# Altium PCB steve.PcbDoc (part 2 of 3)
Units mm, origin at the board's own origin, x right, y up, seen from the top; angles counter-clockwise.
Board outline 168.82 x 167.1 mm, 4 copper layers (Top Layer, Mid-Layer 1, Mid-Layer 2, Bottom Layer); 272 components, 254 nets, 1057 pads, 241 vias.
Unrouted connection lines stored in the file: 229.
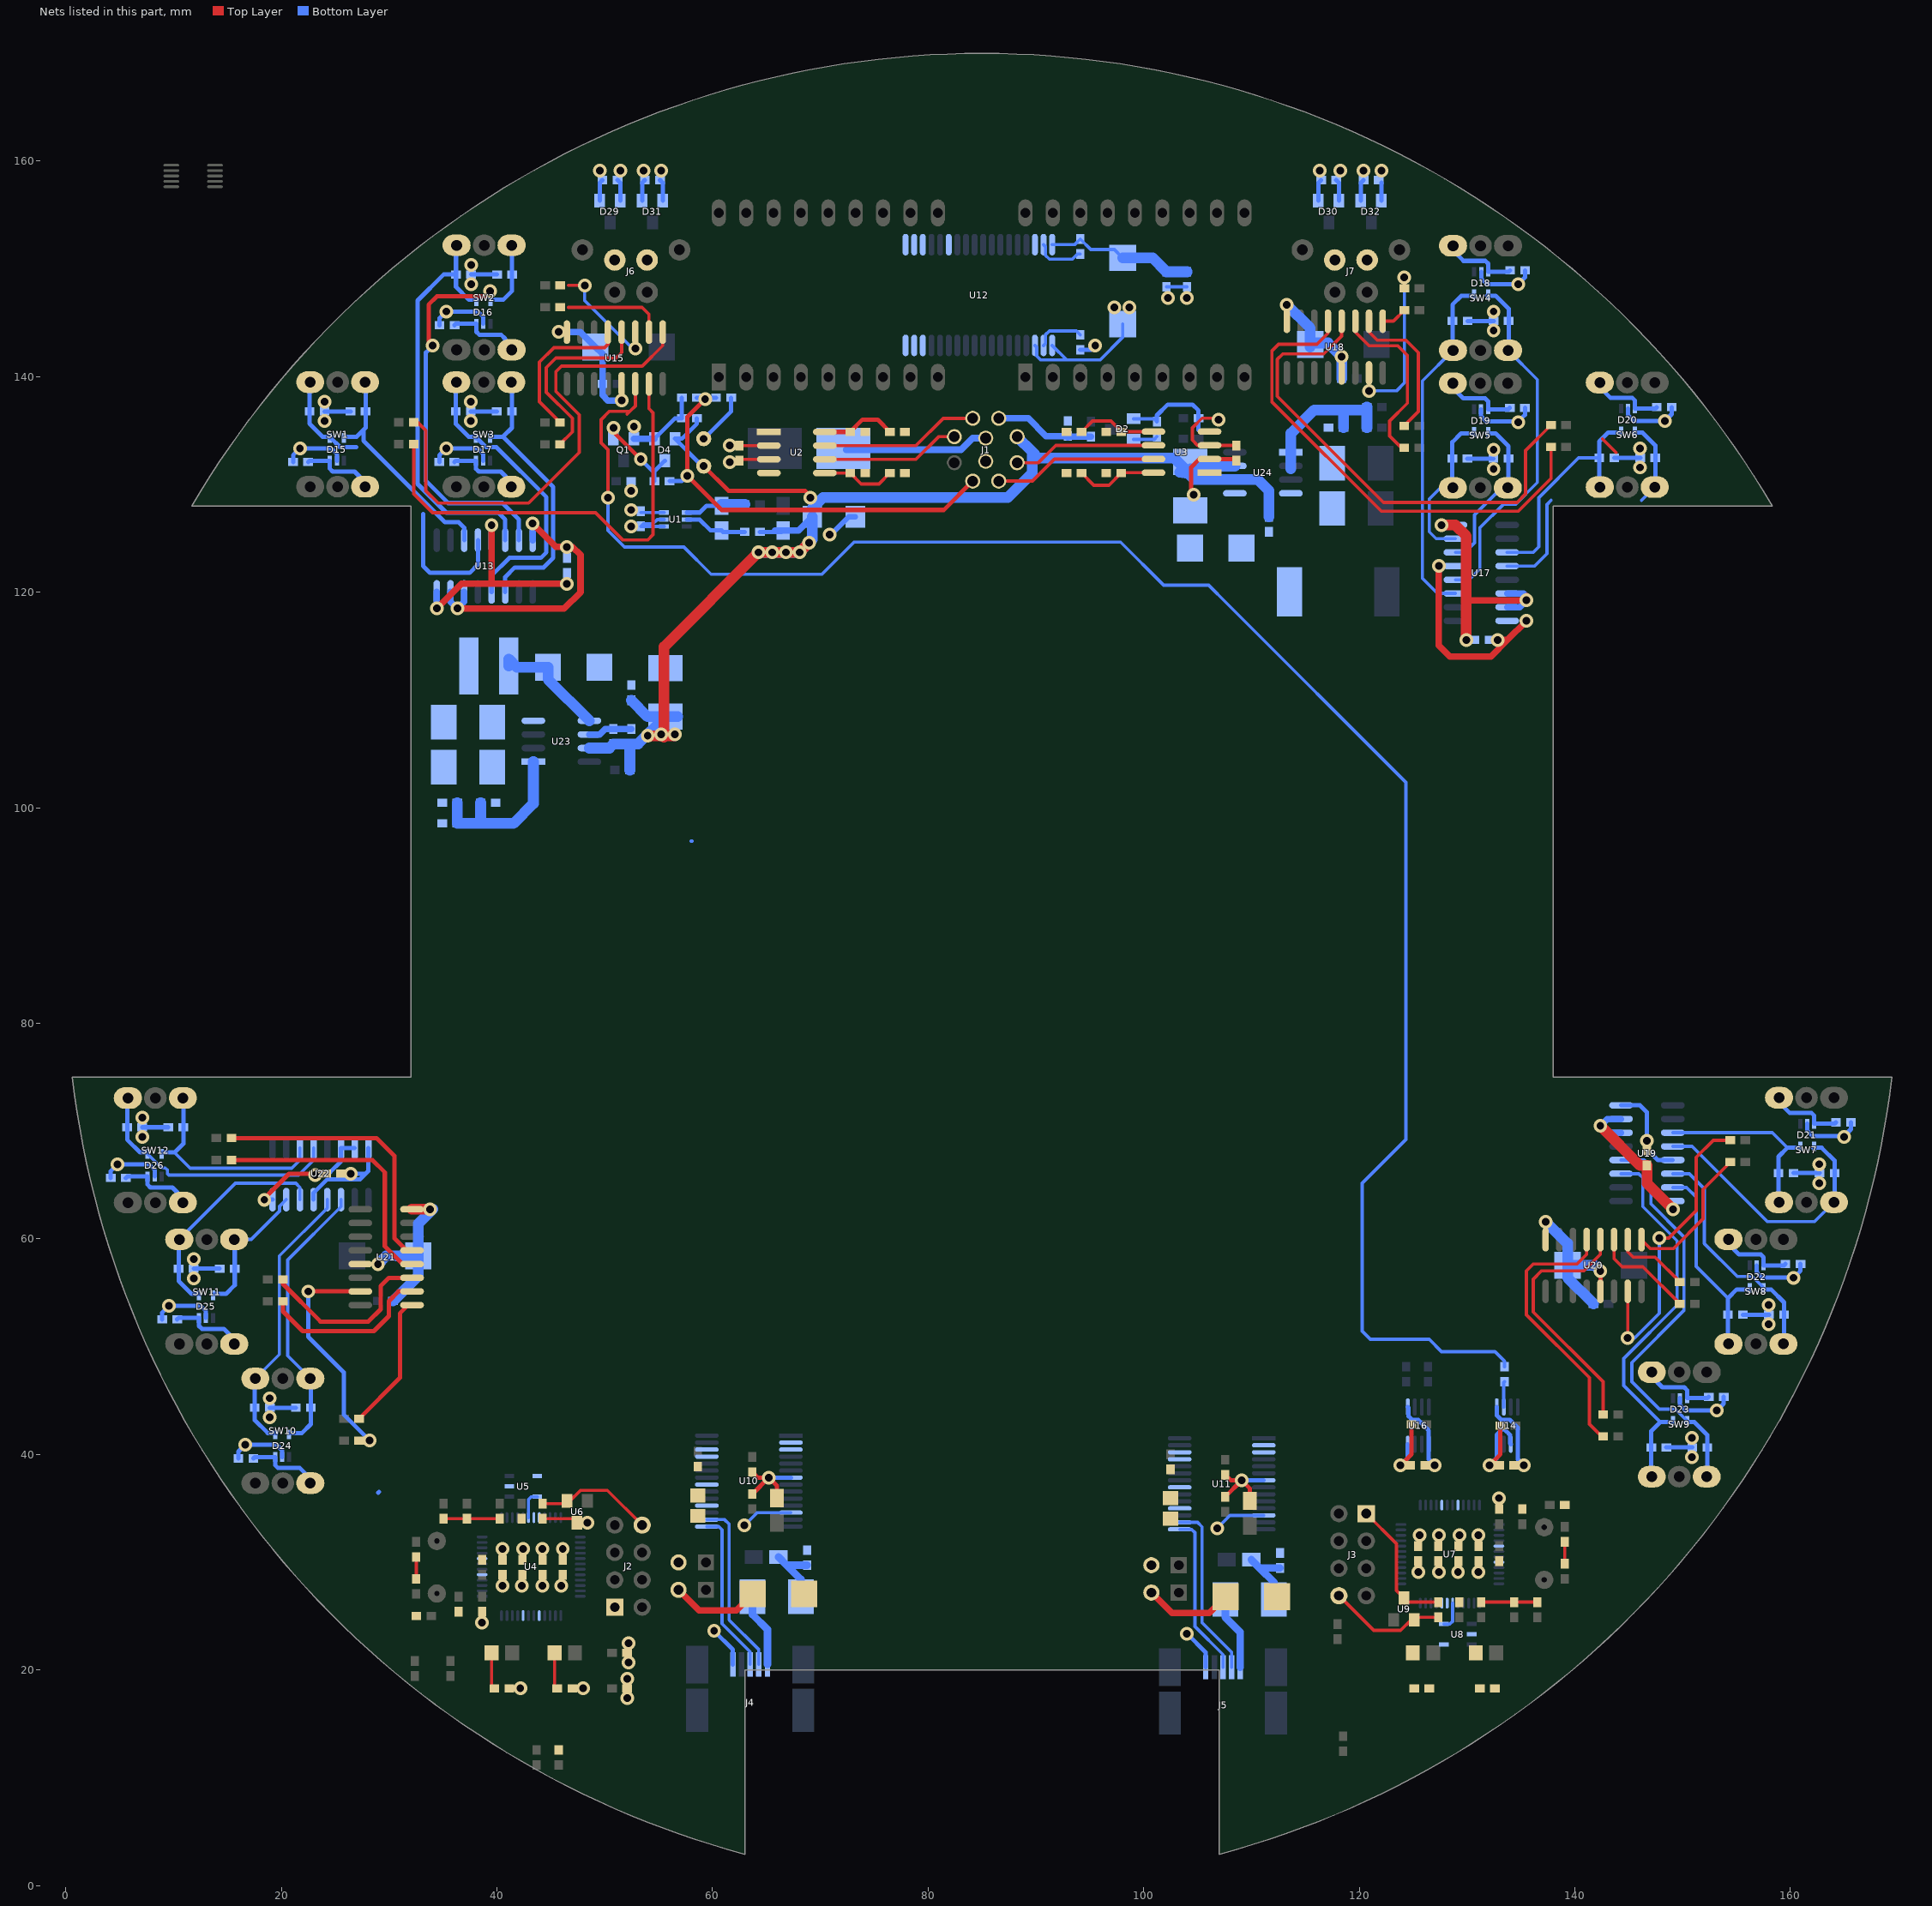
[diagram p4: the nets of this part, all layers, seen from the top]

## Part data
C1 C4 C5 C6 C7 C8 C9 C10 C11 C12 C13 C14 C15 C16 C17 C18 C19 C20 C21 C22 C23 C24 C25 C26 C27 C28 C29 C30 C31 C33 C34 C35 C40 C41 C42 C43 C44 C45 C46 C47 C48 C49 C50 C51 C52 C56 C57 C58 C62 C63 C64 C65 C66: library part CAP, "Capacitor"
C2 C3: library part "Cap Semi", "Capacitor (Semiconductor SIM Model)"
C32 C36 C37 C38 C39: library part "CAP POL3", "Polarized Capacitor (Surface Mount)"
C53 C54 C55 C59 C60 C61: library part "Cap Pol3", "Polarized Capacitor (Surface Mount)"
D1: library part DIODE, "Diode"
D2 D4 D29 D30 D31 D32: "Dual Diode"
D3: library part LED_HOLE, "through hole LED"
D9 D11 D27 D28: library part "D SCHOTTKY", "Schottky Diode"
D13 D14: "13.8mm dual digit 14-segment single digit alphanumeric display"
D15 D16 D17 D18 D19 D20 D21 D22 D23 D24 D25 D26: "8pF 15kV Unidirectional TVS Array 0.5uA@5.5V"
F1 F2 F3: library part FUSE2, "Fuse"
J1 J6 J7: "Connector"
J2 J3: library part LPCLink_Connector
J4 J5: library part USB_miniB_SMT, "USB Mini B Connector"
L1 L2: library part INDUCTOR, "Inductor"
P1 P2 P3 P4: library part "Header 2", "Header, 2-Pin"
Q1: library part N-MOSFET
R1 R22 R29 R32 R33 R34 R35 R36 R37 R38 R39 R40 R41 R42 R43 R44 R45 R111 R113 R115: library part RES1, "Resistor"
R2 R3 R4 R5 R6 R7 R8 R10 R11 R12 R14 R17 R18 R19 R20 R21 R23 R24 R25 R26 R27 R28 R30 R31 R46 R47 R48 R49 R50 R51 R52 R53 R54 R55 R56 R57 R58 R59 R60 R61 R62 R63 R64 R65 R66 R67 R68 R69 R70 R71 R72 R73 R74 R75 R76 R77 R78 R79 R80 R81 R82 R83 R84 R85 R86 R87 R88 R89 R90 R91 R92 R93 R94 R95 R96 R97 R98 R99 R100 R101 R102 R103 R104 R105 R106 R107 R108 R109: library part "Res Semi", "Semiconductor Resistor"
R9: library part Res3, "Resistor"
R13 R15 R16: library part RES, "Standard Resistor"
R110 R112 R114 R116: "Semiconductor Resistor"
SW1 SW2 SW3 SW4 SW5 SW6 SW7 SW8 SW9 SW10 SW11 SW12: "K5V Illuminated Tactile Switch"
U1: "Current Shunt Monitor"
U2 U3: library part SN65HVD235, "3.3V CAN XCVR W/STANDBY"
U4 U7: library part LPC11C14_Full, "NXP LPC11C14 Microcontroller"
U5 U8: "I2C EEPROM for SOT23-5 package"
U6 U9: library part XC61F, "SOT23 reset generator"
U12: "2-Wire Interfaced, 2.7V to 5.5V LED Display Driver"
U13 U17 U19 U22: "Quad CMOS R-S Latches"
U14 U16: "Dual-bit  Dual-supply Bus Transceiver"
U15 U18 U20 U21: "8-Bit Shift Registers with 3-State Output Registers"
U21: "4 Channel Analog Multiplexor"
U23 U24: "Step-down converter"
Y1 Y2: library part CRYSTAL, "Crystal"

## Via types
v1: diameter 1.27, hole 0.711, Top Layer to Bottom Layer, 241 vias

## Nets (pads, with @x,y where several pads share a name; then routed paths per layer and width w, separated by ;. In a path a pad name is that pad's centre, name@x,y a point inside that pad or via, vN(x,y) a via of type N, cw(c..) or ccw(c..) an arc to the next point about the centre after c; other vN are vias at no path point)
3V3: C1.2 C2.2 C4.2 C5.1 C8.1 C9.1 C10.1 C11.1 C13.1 C16.1 C17.1 C18.1 C19.1 C21.1 C32.1 C33.2 C34.1 C46.1 C47.1 C48.1 C49.1 C50.1 C51.1 C52.1 C53.1 C54.1 C63.1 C64.1 C65.1 C66.1 D2.2 D29.2 D30.2 D31.2 D32.2 J2.1 J3.1 J6.4 J7.4 L3.2 P1.2 P3.2 R2.2 R5.1 R8.2 R12.1 R13.2 R18.2 R22.2 R23.2 R24.2 R25.2 R29.2 R30.2 R31.2 R34.2 R35.2 R36.2 R40.2 R41.2 R50.2 R51.2 R55.2 R56.2 R60.2 R61.2 R65.2 R66.2 R70.2 R71.2 R75.2 R76.2 R80.2 R81.2 R85.2 R86.2 R90.2 R91.2 R95.2 R96.2 R100.2 R101.2 R105.2 R106.2 R110.1 U1.3 U2.3 U3.3 U4.8 U4.44 U5.4 U6.3 U7.8 U7.44 U8.4 U9.3 U12.19 U12.21 U13.5 U13.16 U14.1 U14.5 U16.1 U16.5 U17.5 U17.16 U19.5 U19.16 U22.5 U22.16 | length 164.1
  Top Layer w0.3: R24.2@35.052,34.036 R23.2@37.211,34.036 R18.2@40.259,34.036 ; C13.1@44.238,34.036 47.041,34.036 U6.3@47.422,33.655 ; C1.2@62.611,132.334 U2.3@65.218,132.334 ; v1@106.934,136.144 105.41,136.144 104.521,135.255 104.521,134.112 105.005,133.628 U3.3@106.105,133.628 C4.2@108.609,133.628 ; J3.1@120.65,34.506 123.444,31.712 123.444,27.381 U9.3@124.155,26.67 124.536,26.289 C21.1@127.339,26.289 ; R25.2@131.318,26.289 R30.2@134.366,26.289 R31.2@136.525,26.289
  Top Layer w0.6: v1(34.417,118.491) 36.703,120.777 v1(46.482,120.777) ; 39.497,121.031 v1(39.497,126.238) ; v1(127.381,122.428) 127.381,115.062 128.397,114.046 132.207,114.046 133.731,115.57 ; v1(132.842,115.57) 133.731,115.57 ; v1(135.509,117.348) 133.731,115.57
  Bottom Layer w0.3: C2.2@53.34,127.396 U1.3@55.499,127.396 ; 57.994,96.901 58.106,96.901 ; U12.21@89.909,142.899 90.084,142.724 90.084,141.915 90.45,141.549 90.968,141.549 90.973,141.554 92.854,141.554 ; U12.19@91.509,142.899 92.854,141.554 ; C32.1@98.044,144.88 98.044,143.637 95.961,141.554 92.854,141.554 ; D2.2@99.06,134.188 100.965,134.188 C5.1@101.219,134.442 ; C33.2@102.111,148.336 C34.1@104.013,148.336
  Bottom Layer w0.4: R106.2@7.089,70.351 R105.2@9.502,70.351 ; R101.2@11.859,57.23 R100.2@14.272,57.23 ; R96.2@18.923,44.323 R95.2@21.336,44.323 ; U22.5@22.987,63.64 22.987,64.262 24.257,65.532 27.305,65.532 27.813,66.04 ; R51.2@24.003,136.779 R50.2@26.416,136.779 ; v1(26.416,66.04) 27.813,66.04 ; U22.16@28.067,68.44 28.067,66.294 27.813,66.04 ; R61.2@37.569,136.772 R60.2@39.982,136.772 ; R56.2@37.592,149.479 R55.2@40.005,149.479 ; C63.1@51.181,158.242 51.435,157.988 D29.2@51.435,156.337 ; C65.1@55.118,158.242 55.372,157.988 D31.2@55.372,156.337 ; C64.1@117.856,158.242 118.11,157.988 D30.2@118.11,156.337 ; D32.2@122.047,156.337 C66.1@122.047,157.988 ; U16.5@124.501,44.397 124.576,44.322 124.576,43.534 124.913,43.197 125.459,43.197 126.451,42.205 U16.1@126.451,40.947 126.451,39.538 v1(127,38.989) ; R70.2@130.033,132.402 R71.2@132.446,132.402 ; R65.2@130.048,145.161 R66.2@132.461,145.161 ; U14.5@132.756,44.397 132.756,43.609 133.168,43.197 133.968,43.197 134.706,42.459 U14.1@134.706,40.947 134.706,39.538 v1(135.255,38.989) ; R75.2@143.66,132.468 R76.2@146.073,132.468 ; U19.16@144.285,72.39 146.05,72.39 146.685,71.755 v1(146.685,69.088) 146.685,68.326 147.701,67.31 U19.5@149.085,67.31 ; R90.2@148.486,40.647 R91.2@150.899,40.647 ; R85.2@155.598,52.966 R86.2@158.011,52.966 ; R80.2@160.289,66.108 R81.2@162.702,66.108
  Bottom Layer w0.6: v1(34.417,118.491) U13.16@34.417,120.028
  other v1: 42.164,18.288 48.006,18.288 125.476,29.083 127.381,29.083 129.159,29.083 131.064,29.083 40.513,31.242 42.418,31.242 44.196,31.242 46.101,31.242 48.387,33.655 150.876,39.751 150.876,41.529 18.923,43.434 18.923,45.212 157.988,52.07 157.988,53.848 11.859,56.341 11.859,58.119 162.687,65.151 162.687,66.929 7.089,69.462 7.089,71.24 52.451,127.635 52.451,129.413 132.461,131.445 146.05,131.572 61.595,132.08 132.461,133.223 146.05,133.35 24.003,135.89 37.569,135.883 106.934,136.017 24.003,137.668 37.569,137.661 132.461,144.272 132.461,146.05 97.282,146.431 98.679,146.431 102.235,147.32 104.013,147.32 37.592,148.59 37.592,150.368 51.435,159.131 55.245,159.131 118.237,159.131 122.047,159.131
CAN0_H: J1.1 U2.7 | length 14.8
  Top Layer w0.3: U2.7@70.418,133.604 78.867,133.604 81.396,136.133 J1.1@84.139,136.133
CAN0_L: J1.2 U2.6 | length 12.9
  Top Layer w0.3: U2.6@70.418,132.334 78.867,132.334 80.961,134.428 J1.2@82.434,134.428
CAN1_H: J1.5 U3.7 | length 15.2
  Top Layer w0.3: J1.5@86.549,130.313 89.673,130.313 91.718,132.358 U3.7@100.905,132.358
CAN1_L: J1.6 U3.6 | length 13.3
  Top Layer w0.3: J1.6@88.254,132.018 90.235,132.018 91.845,133.628 U3.6@100.905,133.628
CAN_RX_U_lpc11c141: U2.4 U4.19
CAN_RX_U_lpc11c142: U3.4 U7.19
CAN_TX_U_lpc11c141: U2.1 U4.20
CAN_TX_U_lpc11c142: U3.1 U7.20
CL+: C7.1 C55.1 C56.1 C57.1 C61.1 C62.1 D1.K D3.A D4.2 D9.K D11.K J1.7 R7.2 R9.1 R32.2 R111.2 R113.1 U23.7 U24.6 U24.7 | length 137.2
  Top Layer w0.4: D3.A@59.182,131.699 61.468,129.413 68.58,129.413 v1@69.342,128.651
  Top Layer w1: v1(53.975,106.68) v1@55.499,106.68 ; v1@55.499,106.553 v1@55.499,106.68 ; v1(56.515,106.807) 56.388,106.68 v1@55.499,106.68 ; v1(68.961,124.587) v1(68.072,123.698) v1(66.802,123.698) v1(65.532,123.698) v1(64.262,123.698) 55.499,114.935 v1@55.499,106.68
  Bottom Layer w0.4: C7.1@58.547,136.144 58.547,135.636 57.15,134.239 D4.2@56.515,134.239 59.055,131.699 D3.A@59.182,131.699 ; R7.2@64.389,125.603 66.421,125.603 R9.1@66.548,125.73
  Bottom Layer w0.6: 65.786,125.73 67.977,125.73 D1.K@69.247,127 69.247,127.794 69.247,128.619 v1(69.088,128.778)
  Bottom Layer w1: U23.7@48.574,105.537 50.419,105.537 R113.1@50.8,105.918 C57.1@52.451,105.918 ; R111.2@52.324,103.505 52.324,105.791 C57.1@52.451,105.918 ; C56.1@52.451,109.982 53.975,108.458 C55.1@55.626,108.458 ; C55.1@56.769,108.458 C55.1@55.626,108.458 ; v1(64.262,123.698) v1(65.532,123.698) v1(66.802,123.698) v1(68.072,123.698) v1(68.961,124.587) 69.247,124.873 D1.K@69.247,127 ; D1.K@69.247,127.794 70.231,128.778 87.376,128.778 89.662,131.064 89.662,132.461 ; J1.7@88.254,134.428 89.662,133.02 ; 89.952,132.73 89.662,133.02 ; C61.1@102.836,132.461 C61.1@102.812,132.461 ; U24.7@108.452,131.714 105.083,131.714 C61.1@104.321,130.952 ; C62.1@111.633,127 111.633,129.413 110.602,130.444 U24.6@108.452,130.444 104.712,130.444 C61.1@104.038,131.118 ; C57.1@52.451,105.918 53.086,105.918 C55.1@55.626,108.458 ; 89.662,132.461 C61.1@102.812,132.461 ; 89.662,132.461 89.662,133.02 ; C61.1@102.812,132.461 C61.1@104.097,131.176 ; C61.1@104.038,131.118 C61.1@104.097,131.176 ; C61.1@104.038,131.118 103.334,131.118 C61.1@104.321,130.952 ; C61.1@104.097,131.176 104.351,131.43 C61.1@104.321,130.952 ; C61.1@104.097,131.176 C61.1@104.321,130.952
  other v1: 52.197,20.701 52.197,22.479 55.245,106.807
CL-: J1.8 R14.2 R17.2 | length 9.3
  Bottom Layer w0.6: J1.8@86.549,136.133 89.292,136.133 90.932,134.493 R17.2@92.964,134.493 ; R17.2@92.964,134.366 93.04,134.442 R14.2@95.123,134.442
CUTOUT: C6.1 J1.4 R15.2 R16.1 | length 40.7
  Top Layer w0.4: v1@59.055,138.176 v1(59.309,137.922) 57.658,136.271 v1(57.658,130.81) 60.833,127.635 81.461,127.635 J1.4@84.139,130.313
  Bottom Layer w0.4: R16.1@56.007,130.302 57.15,130.302 v1(57.658,130.81) ; C6.1@58.547,138.049 R15.2@60.325,138.049
EEPROM_WP_U_lpc11c141: U4.18 U5.5 | length 2.6
  Bottom Layer w0.3: U4.18@42.921,34.133 42.921,35.809 43.18,36.068 U5.5@43.738,36.068
EEPROM_WP_U_lpc11c142: U7.18 U8.5 | length 2.6
  Bottom Layer w0.3: U8.5@127.839,24.257 128.397,24.257 128.656,24.516 U7.18@128.656,26.192
GND: C1.1 C2.1 C4.1 C5.2 C6.2 C7.2 C8.2 C9.2 C10.2 C11.2 C12.2 C13.2 C14.2 C15.2 C16.2 C17.2 C18.2 C19.2 C20.2 C21.2 C22.2 C23.2 C24.2 C25.1 C26.2 C27.2 C28.2 C29.1 C30.2 C31.2 C32.2 C33.1 C34.2 C35.1 C36.2 C37.2 C38.2 C39.2 C40.2 C41.2 C42.2 C43.2 C44.2 C45.2 C46.2 C47.2 C48.2 C49.2 C50.2 C51.2 C53.2 C54.2 C55.2 C56.2 C59.2 C60.2 C61.2 C62.2 C63.2 C64.2 C65.2 C66.2 D1.A D2.1 D4.1 D15.2 D16.2 D17.2 D18.2 D19.2 D20.2 D21.2 D22.2 D23.2 D24.2 D25.2 D26.2 D27.A D28.A D29.1 D30.1 D31.1 D32.1 J1.10 J2.8 J3.8 J4.5 J5.5 J6.2 J7.2 Q1.2 R1.1 R3.1 R4.1 R10.1 R11.1 R17.1 R20.1 R27.1 R33.1 R46.2 R52.1 R57.1 R62.1 R67.1 R72.1 R77.1 R82.1 R87.1 R92.1 R97.1 R102.1 R107.1 R112.1 R116.1 U1.1 U1.2 U2.2 U3.2 U4.5 U4.41 U5.2 U6.2 U7.5 U7.41 U8.2 U9.2 U10.7 U10.18 U10.21 U10.25 U10.26 U11.7 U11.18 U11.21 U11.25 U11.26 U12.1 U12.2 U12.3 U12.6 U12.16 U12.18 U12.34 U12.35 U12.36 U13.8 U13.14 U13.15 U14.2 U14.4 U15.8 U15.13 U16.4 U17.8 U17.14 U17.15 U18.8 U18.13 U19.8 U19.14 U19.15 U20.8 U20.13 U21.8@32.118,62.738 U21.13 U22.8 U22.14 U22.15 U23.4 U24.4 | length 321.9
  Top Layer w0.3: C15.2@32.512,28.445 C12.2@32.512,30.48 ; C13.2@44.238,35.433 46.228,35.433 U6.2@46.482,35.687 46.767,35.687 47.742,36.662 50.244,36.662 J2.8@53.467,33.439 ; C1.1@62.484,133.604 U2.2@65.218,133.604 ; J3.8@118.11,26.886 121.333,23.663 123.835,23.663 124.81,24.638 U9.2@125.095,24.638 125.349,24.892 C21.2@127.339,24.892 ; C20.2@139.065,29.845 C23.2@139.065,31.88
  Top Layer w0.4: v1@18.351,63.691 20.701,66.04 C48.2@24.13,66.04 ; C27.2@63.699,36.322 v1@65.222,37.845 ; C24.2@63.699,38.354 64.208,37.845 v1@65.222,37.845 ; C25.1@65.985,35.941 65.985,37.084 v1(65.224,37.845) v1@65.222,37.845 ; v1@104.648,129.159 104.394,129.413 104.394,131.572 105.18,132.358 U3.2@106.105,132.358 108.434,132.358 C4.1@108.585,132.207 ; C31.2@107.569,36.068 v1(109.094,37.591) ; C28.2@107.569,38.1 108.078,37.591 v1(109.094,37.591) ; C29.1@109.855,35.687 109.855,36.83 v1(109.094,37.591) v1(109.094,37.591) ; v1(123.825,38.989) 124.841,40.005 C40.2@124.841,42.799 ; v1(132.08,38.989) 133.096,40.005 C41.2@133.096,42.672 ; U20.13@142.367,55.131 v1(142.367,57.023)
  Top Layer w0.6: v1(36.322,118.491) 46.228,118.491 47.752,120.015 47.752,123.444 46.99,124.206 45.466,124.206 v1(43.307,126.365) ; 129.921,119.253 v1(135.509,119.253) v1@135.509,119.634
  Top Layer w1: U21.8@32.118,62.738 v1(33.782,62.738) ; v1(127.635,126.238) 128.905,126.238 129.921,125.222 129.921,119.253 v1(129.921,115.57) ; v1(142.367,70.485) 146.05,66.802 C49.2@146.685,66.802 146.685,65.151 v1(149.098,62.738)
  Bottom Layer w0.3: U1.1@55.499,126.096 55.499,126.111 C2.1@53.34,126.111 53.594,126.365 54.483,126.365 54.864,126.746 U1.2@55.499,126.746 ; U12.18@91.509,152.249 93.575,152.249 R46.2@94.107,152.781 95.092,151.796 97.278,151.796 C32.2@98.044,151.03 ; D2.1@99.06,136.093 100.965,136.093 C5.2@101.219,135.839
  Bottom Layer w0.4: R107.1@4.168,65.652 4.168,66.287 v1(4.803,66.922) 7.724,66.922 8.232,66.414 D26.2@8.232,65.779 ; R102.1@8.938,52.531 8.938,53.166 v1(9.573,53.801) 12.494,53.801 13.002,53.293 D25.2@13.002,52.658 ; R97.1@16.002,39.624 16.002,40.259 v1(16.637,40.894) 19.558,40.894 20.066,40.386 D24.2@20.066,39.751 ; v1(18.415,63.627) 18.428,63.64 U22.8@19.177,63.64 ; R52.1@21.082,132.08 21.082,132.715 v1(21.717,133.35) 24.638,133.35 25.146,132.842 D15.2@25.146,132.207 ; v1(23.114,65.913) 23.368,66.167 24.511,66.167 25.527,67.183 U22.14@25.527,68.44 U22.15@26.797,68.44 ; R62.1@34.648,132.073 34.648,132.708 v1(35.283,133.343) 38.204,133.343 38.712,132.835 D17.2@38.712,132.2 ; R57.1@34.671,144.78 34.671,145.415 v1(35.306,146.05) 38.227,146.05 38.735,145.542 D16.2@38.735,144.907 ; D29.1@49.53,156.337 49.53,157.988 C63.2@49.784,158.242 ; D31.1@53.467,156.337 53.467,157.988 C65.2@53.721,158.242 ; D4.1@54.61,134.239 56.515,136.144 C7.2@57.15,136.144 C6.2@57.15,138.049 ; v1(60.143,23.622) 61.887,21.878 J4.5@61.887,20.504 ; v1(65.224,37.845) U10.7@67.265,37.845 ; C35.1@94.107,142.494 95.123,142.494 v1(95.504,142.875) ; C5.2@101.219,135.839 101.219,136.398 102.235,137.414 104.521,137.414 105.083,136.852 R1.1@105.083,136.144 105.083,135.035 ; v1(104.013,23.368) 105.757,21.624 J5.5@105.757,20.25 ; v1(109.094,37.591) U11.7@111.135,37.591 ; D30.1@116.205,156.337 116.205,157.988 C64.2@116.459,158.242 ; D32.1@120.142,156.337 120.142,157.988 C66.2@120.396,158.242 ; v1(123.825,38.989) 124.501,39.665 U16.4@124.501,40.947 ; D19.2@131.303,136.974 131.303,136.339 131.811,135.831 134.732,135.831 135.367,136.466 R72.1@135.367,137.101 ; D18.2@131.318,149.733 131.318,149.098 131.826,148.59 v1(134.747,148.59) 135.382,149.225 R67.1@135.382,149.86 ; v1(132.08,38.989) 132.756,39.665 U14.4@132.756,40.947 132.756,41.824 133.35,42.418 133.621,42.147 133.644,42.147 133.981,41.81 133.981,41.022 U14.2@134.056,40.947 ; D20.2@144.93,137.04 144.93,136.405 145.438,135.897 148.359,135.897 148.994,136.532 R77.1@148.994,137.167 ; D23.2@149.756,45.219 149.756,44.584 150.264,44.076 153.185,44.076 153.82,44.711 R92.1@153.82,45.346 ; D22.2@156.868,57.538 156.868,56.903 157.376,56.395 160.297,56.395 160.932,57.03 R87.1@160.932,57.665 ; D21.2@161.559,70.68 161.559,70.045 162.067,69.537 164.988,69.537 165.623,70.172 R82.1@165.623,70.807
  Bottom Layer w0.5: v1@71.12,125.476 72.644,127 D1.A@73.247,127
  Bottom Layer w0.6: U13.15@35.687,120.028 35.687,119.126 v1(36.322,118.491) 36.957,119.126 U13.14@36.957,120.028 ; U13.8@43.307,124.828 v1(43.307,126.365) ; v1(45.72,144.145) 47.734,144.145 C39.2@49.131,142.748 49.784,142.095 C45.2@49.784,139.319 49.784,138.303 50.292,137.795 v1(51.562,137.795) ; Q1.2@52.705,134.239 D4.1@54.61,134.239 ; U17.15@133.718,118.618 134.874,118.618 v1(135.509,119.253) 135.7,119.444 135.255,119.888 U17.14@133.718,119.888 ; U19.14@144.285,69.85 143.002,69.85 v1(142.367,70.485) 143.002,71.12 U19.15@144.285,71.12
  Bottom Layer w1: v1(28.956,57.658) 29.718,58.42 C36.2@32.702,58.42 ; C42.2@30.353,54.229 32.702,56.578 C36.2@32.702,58.42 ; v1@34.036,62.738 32.702,61.404 C36.2@32.702,58.42 ; C32.2@98.044,151.03 100.814,151.03 C33.1@102.108,149.736 102.111,149.733 C34.2@104.013,149.733 ; v1(113.284,146.685) 115.452,144.517 115.452,143.129 117.094,143.129 v1(118.364,141.859) C44.2@118.364,139.827 ; C38.2@115.452,142.739 C38.2@115.452,143.002 ; v1(137.287,61.595) 139.328,59.554 C37.2@139.328,57.531 ; C43.2@141.732,53.975 139.328,56.379 C37.2@139.328,57.531 ; v1(142.367,57.023) 141.859,57.531 C37.2@139.328,57.531
  other v1: 52.07,17.399 52.07,19.177 38.608,24.384 40.513,27.813 42.291,27.813 44.196,27.813 45.974,27.813 125.603,32.512 127.381,32.512 129.286,32.512 131.064,32.512 132.969,35.941 153.162,44.069 160.274,56.388 164.973,69.469 46.482,124.206 70.866,125.349 52.451,126.111 104.648,129.032 61.595,133.604 52.705,135.382 134.747,135.763 148.336,135.89 49.53,159.131 53.594,159.131 116.332,159.131 120.396,159.131
IBUT0.LED1_C: R53.1 U15.15 | length 42.9
  Top Layer w0.3: R53.1@32.281,133.738 32.281,129.136 34.036,127.381 49.149,127.381 51.689,124.841 53.975,124.841 54.483,125.349 54.483,136.652 54.102,137.033 U15.15@54.102,139.332
IBUT0.LED2_C: R54.1 U15.1 | length 44.2
  Top Layer w0.3: R54.1@32.281,135.77 32.632,135.77 33.401,135.001 33.401,129.413 34.544,128.27 42.926,128.27 47.625,132.969 47.625,136.47 45.466,138.629 45.466,140.462 45.974,140.97 53.467,140.97 55.372,142.875 U15.1@55.372,144.132
IBUT0.NC: D15.5 R50.1 SW1.1 U13.3 | length 21.3
  Bottom Layer w0.4: D15.5@25.923,134.434 26.992,134.434 27.622,135.064 ; SW1.1@27.765,139.493 27.813,139.445 R50.1@27.813,136.779 27.813,135.255 27.622,135.064 ; U13.3@36.957,124.828 36.957,125.984 36.449,126.492 35.179,126.492 27.622,134.048 27.622,135.064
IBUT0.NO: D15.4 R51.1 SW1.3 U13.4 | length 22
  Bottom Layer w0.4: SW1.3@22.665,139.493 22.606,139.436 R51.1@22.606,136.779 22.606,135.636 23.808,134.434 D15.4@24.623,134.434 ; D15.4@24.496,134.307 24.58,134.307 25.43,133.457 26.944,133.457 ; 33.147,127.254 33.147,122.428 33.782,121.793 37.465,121.793 38.227,122.555 U13.4@38.227,124.828
IBUT1.LED1_C: R58.1 U15.2 | length 9.4
  Top Layer w0.3: 46.632,146.438 53.46,146.438 54.102,145.796 U15.2@54.102,144.132
IBUT1.LED2_C: R59.1 U15.3 | length 9.4
  Top Layer w0.3: 46.632,148.47 v1@48.126,148.47
  Bottom Layer w0.3: v1(48.133,148.463) 48.133,147.066 52.578,142.621 v1(52.832,142.621)
IBUT1.NC: D16.5 R55.1 SW2.1 U13.7 | length 41.7
  Top Layer w0.4: v1(34.036,142.875) 33.655,143.256 33.655,146.685 34.417,147.447 38.862,147.447 v1(39.37,147.955)
  Bottom Layer w0.4: v1@34.163,142.875 v1(34.036,142.875) 33.401,142.24 33.401,130.336 35.467,128.27 40.513,128.27 42.037,126.746 U13.7@42.037,124.828 ; D16.5@39.512,147.134 40.581,147.134 41.402,147.955 R55.1@41.402,149.479 41.402,152.145 SW2.1@41.354,152.193
IBUT1.NO: D16.4 R56.1 SW2.3 U13.6 | length 39.4
  Bottom Layer w0.4: SW2.3@36.254,152.193 36.195,152.136 R56.1@36.195,149.479 ; D16.4@38.212,147.134 37.397,147.134 36.195,148.336 R56.1@36.195,149.479 ; U13.6@40.767,124.828 40.767,126.746 40.132,127.381 35.306,127.381 32.639,130.048 32.639,147.066 35.052,149.479 R56.1@36.195,149.479
IBUT2.LED1_C: R63.1 U15.4 | length 19.8
  Top Layer w0.3: R63.1@45.847,133.731 46.99,134.874 46.99,136.144 44.577,138.557 44.577,140.843 45.466,141.732 51.054,141.732 51.562,142.24 U15.4@51.562,144.132 ; 142.57,134.208 143.813,132.965
IBUT2.LED2_C: R64.1 U15.5 | length 14.5
  Top Layer w0.3: R64.1@45.847,135.763 43.942,137.668 43.942,141.351 45.273,142.682 49.972,142.682 50.292,143.002 U15.5@50.292,144.132
IBUT2.NC: D17.5 R60.1 SW3.1 U13.11 | length 26.2
  Bottom Layer w0.4: D17.5@39.489,134.427 40.558,134.427 ; U13.11@40.767,120.028 40.767,121.412 41.656,122.301 44.323,122.301 45.212,123.19 45.212,129.773 40.558,134.427 ; SW3.1@41.331,139.487 41.379,139.438 R60.1@41.379,136.772 41.379,135.248 40.558,134.427
IBUT2.NO: D17.4 R61.1 SW3.3 U13.12 | length 27.8
  Bottom Layer w0.4: SW3.3@36.231,139.487 36.172,139.429 R61.1@36.172,136.772 36.172,135.629 37.374,134.427 D17.4@38.189,134.427 ; D17.4@38.062,134.3 38.146,134.3 38.996,133.45 39.947,133.45 44.577,128.82 44.577,123.698 44.069,123.19 41.148,123.19 39.497,121.539 U13.12@39.497,120.028
IBUT3.LED1_C: R68.1 U18.15 | length 14.4
  Top Layer w0.3: R68.1@124.183,148.202 v1(124.183,149.202)
  Bottom Layer w0.3: v1(120.904,138.684) 123.444,138.684 124.183,139.423 v1(124.183,149.202)
IBUT3.LED2_C: R69.1 U18.1 | length 2.4
  Top Layer w0.3: U18.1@122.174,145.148 123.161,145.148 R69.1@124.183,146.17
IBUT3.NC: D18.5 R65.1 SW4.1 U17.3 | length 32.5
  Bottom Layer w0.3: SW4.1@128.699,142.447 125.857,139.604 125.857,121.285 127.254,119.888 U17.3@128.918,119.888
  Bottom Layer w0.4: SW4.1@128.699,142.447 128.651,142.495 R65.1@128.651,145.161 128.651,146.685 129.472,147.506 D18.5@130.541,147.506
IBUT3.NO: D18.4 R66.1 SW4.3 U17.4 | length 33.4
  Bottom Layer w0.3: U17.4@128.918,121.158 130.175,121.158 131.191,122.174 131.191,125.984 133.35,128.143 134.493,128.143 136.525,130.175 136.525,139.721 SW4.3@133.799,142.447
  Bottom Layer w0.4: D18.4@131.841,147.506 132.656,147.506 133.858,146.304 R66.1@133.858,145.161 133.858,142.504 SW4.3@133.799,142.447
IBUT4.LED1_C: R73.1 U18.2 | length 13.7
  Top Layer w0.3: U18.2@120.904,145.148 120.904,144.145 121.666,143.383 124.333,143.383 125.476,142.24 125.476,136.751 R73.1@124.168,135.443
IBUT4.LED2_C: R74.1 U18.3 | length 16.7
  Top Layer w0.3: U18.3@119.634,145.148 119.634,144.145 120.904,142.875 123.571,142.875 124.46,141.986 124.46,137.541 122.809,135.89 122.809,134.493 123.891,133.411 R74.1@124.168,133.411
IBUT4.NC: D19.5 R70.1 SW5.1 U17.7 | length 14.8
  Bottom Layer w0.3: SW5.1@128.684,129.688 127.529,129.688 126.492,128.651 126.492,125.603 127.127,124.968 U17.7@128.918,124.968
  Bottom Layer w0.4: SW5.1@128.684,129.688 128.636,129.736 R70.1@128.636,132.402 128.636,133.926 129.457,134.747 D19.5@130.526,134.747
IBUT4.NO: D19.4 R71.1 SW5.3 U17.6 | length 15.3
  Bottom Layer w0.3: U17.6@128.918,123.698 129.794,123.698 130.683,124.587 130.683,127.177 133.194,129.688 SW5.3@133.784,129.688
  Bottom Layer w0.4: D19.4@131.826,134.747 132.641,134.747 133.843,133.545 R71.1@133.843,132.402 133.843,129.745 SW5.3@133.784,129.688
IBUT5.LED1_C: R78.1 U18.4 | length 46.5
  Top Layer w0.3: U18.4@118.364,145.148 118.364,143.764 116.713,142.113 112.903,142.113 112.395,141.605 112.395,138.176 122.233,128.338 134.644,128.338 135.434,129.128 135.434,133.148 R78.1@137.795,135.509
IBUT5.LED2_C: R79.1 U18.5 | length 46
  Top Layer w0.3: U18.5@117.094,145.148 117.094,144.018 116.078,143.002 112.522,143.002 111.887,142.367 111.887,137.668 122.047,127.508 134.747,127.508 137.795,130.556 R79.1@137.795,133.477
IBUT5.NC: D20.5 R75.1 SW6.1 U17.11 | length 21.3
  Bottom Layer w0.3: U17.11@133.718,123.698 136.144,123.698 136.652,124.206 136.652,128.778 140.342,132.468 R75.1@142.263,132.468
  Bottom Layer w0.4: SW6.1@142.311,129.753 142.263,129.802 R75.1@142.263,132.468 142.263,133.992 143.084,134.813 D20.5@144.153,134.813
IBUT5.NO: D20.4 R76.1 SW6.3 U17.12 | length 17.4
  Bottom Layer w0.3: U17.12@133.718,122.428 136.271,122.428 137.414,123.571 137.414,128.143 137.795,128.524 ; 146.182,128.524 SW6.3@147.411,129.753
  Bottom Layer w0.4: D20.4@145.453,134.813 146.268,134.813 147.47,133.611 R76.1@147.47,132.468 147.47,129.811 SW6.3@147.411,129.753
IBUT6.LED1_C: R83.1 U20.15 | length 28.4
  Top Layer w0.3: v1(144.907,50.8) U20.15@144.907,55.131 ; v1(147.828,60.071) 148.717,60.071 151.257,62.611 151.257,67.564 152.842,69.149 R83.1@154.424,69.149
  Bottom Layer w0.3: v1(144.907,50.8) 145.542,50.8 147.828,53.086 v1(147.828,60.071)
IBUT6.LED2_C: R84.1 U20.1 | length 13.5
  Top Layer w0.3: U20.1@146.177,59.931 147.022,59.086 149.129,59.086 151.892,61.849 151.892,64.585 R84.1@154.424,67.117
IBUT6.NC: D21.5 R80.1 SW7.1 U19.3 | length 17.7
  Bottom Layer w0.3: U19.3@149.085,69.85 158.316,69.85 159.713,68.453
  Bottom Layer w0.4: SW7.1@158.94,63.394 158.892,63.442 R80.1@158.892,66.108 158.892,67.632 159.713,68.453 D21.5@160.782,68.453
IBUT6.NO: D21.4 R81.1 SW7.3 U19.4 | length 25
  Bottom Layer w0.3: U19.4@149.085,68.58 150.876,68.58 157.861,61.595 162.242,61.595 SW7.3@164.04,63.394
  Bottom Layer w0.4: D21.4@162.082,68.453 162.897,68.453 164.099,67.251 R81.1@164.099,66.108 164.099,63.451 SW7.3@164.04,63.394
IBUT7.LED1_C: R88.1 U20.2 | length 7.1
  Top Layer w0.3: U20.2@144.907,59.931 144.907,58.801 145.415,58.293 147.447,58.293 R88.1@149.733,56.007
IBUT7.LED2_C: R89.1 U20.3 | length 9.6
  Top Layer w0.3: U20.3@143.637,59.931 143.637,58.166 144.399,57.404 146.304,57.404 R89.1@149.733,53.975
IBUT7.NC: D22.5 R85.1 SW8.1 U19.7 | length 19.6
  Bottom Layer w0.3: U19.7@149.085,64.77 150.368,64.77 151.257,63.881 151.257,57.434 154.201,54.49
  Bottom Layer w0.4: SW8.1@154.249,50.251 154.201,50.3 R85.1@154.201,52.966 154.201,54.49 155.022,55.311 D22.5@156.091,55.311
IBUT7.NO: D22.4 R86.1 SW8.3 U19.6 | length 22.3
  Bottom Layer w0.3: U19.6@149.085,66.04 150.622,66.04 152.019,64.643 152.019,59.563 155.067,56.515 156.464,56.515 157.391,55.588 D22.4@157.391,55.311
  Bottom Layer w0.4: D22.4@157.391,55.311 158.206,55.311 159.408,54.109 R86.1@159.408,52.966 159.408,50.309 SW8.3@159.349,50.251
IBUT8.LED1_C: R93.1 U20.4 | length 23.8
  Top Layer w0.3: U20.4@142.367,59.931 142.367,58.547 140.843,57.023 136.906,57.023 136.144,56.261 136.144,53.213 142.621,46.736 R93.1@142.621,43.688
IBUT8.LED2_C: R94.1 U20.5 | length 26
  Top Layer w0.3: U20.5@141.097,59.931 141.097,58.547 140.208,57.658 136.144,57.658 135.509,57.023 135.509,52.959 141.351,47.117 141.351,42.799 142.494,41.656 R94.1@142.621,41.656
IBUT8.NC: D23.5 R90.1 SW9.1 U19.11 | length 36.1
  Bottom Layer w0.3: U19.11@144.285,66.04 145.923,66.04 146.304,65.659 146.304,62.992 149.479,59.817 149.479,53.848 144.526,48.895 144.526,46.376 147.91,42.992
  Bottom Layer w0.4: SW9.1@147.137,37.932 147.089,37.981 R90.1@147.089,40.647 147.089,42.171 147.91,42.992 D23.5@148.979,42.992
IBUT8.NO: D23.4 R91.1 SW9.3 U19.12 | length 39.3
  Bottom Layer w0.3: U19.12@144.285,67.31 146.431,67.31 147.066,66.675 147.066,63.246 150.114,60.198 150.114,53.34 145.288,48.514 145.288,46.736 147.828,44.196 149.329,44.196 D23.4@150.406,43.119
  Bottom Layer w0.4: 28.979,36.446 29.037,36.504 ; D23.4@150.279,42.992 151.094,42.992 152.296,41.79 R91.1@152.296,40.647 SW9.3@152.296,37.99
IBUT9.LED1_C: R98.1 U21.15 | length 22
  Top Layer w0.4: v1(22.479,55.118) 24.892,55.118 U21.15@27.318,55.118 ; R98.1@27.201,41.282 v1(28.194,41.282)
  Bottom Layer w0.4: v1(22.479,55.118) 22.479,50.927 25.781,47.625 25.781,43.695 v1(28.194,41.282)
IBUT9.LED2_C: R99.1 U21.1@32.118,53.848 | length 12.8
  Top Layer w0.4: R99.1@27.201,43.314 30.988,47.101 30.988,53.086 31.75,53.848 U21.1@32.118,53.848
IBUT9.NC: D24.5 R95.1 SW10.1 U22.3 | length 26
  Bottom Layer w0.3: SW10.1@22.685,47.037 20.574,49.148 20.574,58.039 25.527,62.992 U22.3@25.527,63.64
  Bottom Layer w0.4: D24.5@20.843,41.978 21.912,41.978 22.733,42.799 R95.1@22.733,44.323 22.733,46.989 SW10.1@22.685,47.037
IBUT9.NO: D24.4 R96.1 SW10.3 U22.4 | length 25.8
  Bottom Layer w0.3: SW10.3@17.585,47.037 19.812,49.265 19.812,58.42 24.257,62.865 U22.4@24.257,63.64
  Bottom Layer w0.4: SW10.3@17.585,47.037 17.526,46.98 R96.1@17.526,44.323 17.526,43.18 18.728,41.978 D24.4@19.543,41.978
IBUT10.LED1_C: R103.1 U21.2@32.118,55.118 | length 16
  Top Layer w0.4: R103.1@20.137,54.188 20.137,53.269 21.971,51.435 28.575,51.435 29.972,52.832 29.972,54.229 30.861,55.118 U21.2@32.118,55.118
IBUT10.LED2_C: R104.1 U21.3@32.118,56.388 | length 16.8
  Top Layer w0.4: R104.1@20.137,56.22 20.137,55.809 23.622,52.324 28.067,52.324 29.21,53.467 29.21,55.626 29.972,56.388 U21.3@32.118,56.388
IBUT10.NC: D25.5 R100.1 SW11.1 U22.7 | length 13.1
  Bottom Layer w0.3: SW11.1@15.621,59.944 17.2,59.944 19.827,62.571 19.827,63.02 U22.7@20.447,63.64
  Bottom Layer w0.4: D25.5@13.779,54.885 14.848,54.885 15.669,55.706 R100.1@15.669,57.23 15.669,59.896 SW11.1@15.621,59.944
IBUT10.NO: D25.4 R101.1 SW11.3 U22.6 | length 21
  Bottom Layer w0.3: SW11.3@10.521,59.944 15.728,65.151 21.336,65.151 21.717,64.77 U22.6@21.717,63.64
  Bottom Layer w0.4: SW11.3@10.521,59.944 10.462,59.887 R101.1@10.462,57.23 10.462,56.087 11.664,54.885 D25.4@12.479,54.885
IBUT11.LED1_C: R108.1 U21.4@32.118,57.658 | length 24.8
  Top Layer w0.4: R108.1@15.367,67.31 28.448,67.31 29.591,66.167 29.591,59.309 31.242,57.658 U21.4@32.118,57.658
IBUT11.LED2_C: R109.1 U21.5@32.118,58.928 | length 25.5
  Top Layer w0.4: R109.1@15.367,69.342 28.829,69.342 30.48,67.691 30.48,60.046 31.598,58.928 U21.5@32.118,58.928
IBUT11.NC: D26.5 R105.1 SW12.1 U22.11 | length 20.2
  Bottom Layer w0.3: 10.078,68.006 11.536,66.548 20.955,66.548 21.717,67.31 U22.11@21.717,68.44
  Bottom Layer w0.4: D26.5@9.009,68.006 10.078,68.006 10.899,68.827 R105.1@10.899,70.351 10.899,73.017 SW12.1@10.851,73.066
IBUT11.NO: D26.4 R106.1 SW12.3 U22.12 | length 24.5
  Bottom Layer w0.3: D26.4@7.582,67.879 8.882,66.579 9.227,66.579 9.432,66.374 9.432,66.029 9.548,65.913 21.59,65.913 22.987,67.31 U22.12@22.987,68.44
  Bottom Layer w0.4: SW12.3@5.751,73.066 5.692,73.008 R106.1@5.692,70.351 5.692,69.208 6.894,68.006 D26.4@7.709,68.006
NetC3_1: C3.1 R6.1 U1.4 | length 5.8
  Bottom Layer w0.4: U1.4@57.599,127.396 58.816,127.396 59.436,128.016 C3.1@60.833,128.016
  Bottom Layer w1: C3.1@60.833,128.016 60.833,128.143 R6.1@62.992,128.143
NetC3_2: C3.2 R7.1 U1.5 | length 5.7
  Bottom Layer w0.4: U1.5@57.599,126.746 58.801,126.746 59.817,125.73 C3.2@60.833,125.73 ; C3.2@60.96,125.603 R7.1@62.992,125.603
NetC26_1: C26.1 F2.2 L1.1 | length 6.5
  Bottom Layer w0.7: L1.1@66.112,30.48 66.874,29.718 ; F2.2@68.199,26.797 68.199,28.393 66.874,29.718 ; C26.1@68.779,29.718 66.874,29.718
NetC30_1: C30.1 F3.2 L2.1 | length 6.5
  Bottom Layer w0.7: L2.1@109.982,30.226 110.744,29.464 ; F3.2@112.069,26.543 112.069,28.139 110.744,29.464 ; C30.1@112.649,29.464 110.744,29.464
NetC35_2: C35.2 U12.20 | length 4.6
  Bottom Layer w0.3: U12.20@90.709,142.899 90.884,143.074 90.884,143.883 91.25,144.249 93.749,144.249 C35.2@94.107,143.891
NetC52_2: C52.2 R110.2 R112.2 U23.1 | length 15.5
  Bottom Layer w1: R110.2@36.322,100.457 C52.2@36.322,98.552 38.481,98.552 ; R112.2@38.481,100.457 38.481,98.552 ; U23.1@43.374,104.267 43.374,100.397 41.529,98.552 38.481,98.552
NetC57_2: C57.2 R113.2 U23.6 | length 4.1
  Bottom Layer w0.6: U23.6@48.574,106.807 49.53,106.807 50.038,107.315 R113.2@50.8,107.315 C57.2@52.451,107.315
NetC58_2: C58.2 R114.2 R116.2 U24.1 | length 14.6
  Bottom Layer w1: 113.652,131.46 113.652,134.734 115.824,136.906 118.276,136.906 ; R116.2@118.545,135.27 118.545,136.906 120.435,136.906 C58.2@120.704,137.175 R114.2@120.704,135.27
NetD3_K: D3.K R15.1 | length 4.9
  Bottom Layer w0.4: D3.K@59.182,134.239 61.722,136.779 R15.1@61.722,138.049
NetD4_3: D4.3 Q1.1 R16.2 | length 8.3
  Top Layer w0.4: v1@51.054,135.382 50.8,135.128 50.8,134.874 v1(53.34,132.334)
  Bottom Layer w0.4: v1(53.34,132.334) 54.61,131.064 ; R16.2@54.61,130.302 54.61,131.064 ; D4.3@55.575,132.207 54.61,131.242 54.61,131.064
  other v1: 50.8,135.255
NetD5_A: D5.A R34.1 | length 3.4
  Top Layer w0.3: D5.A@39.497,21.59 39.497,18.542 R34.1@39.751,18.288
NetD6_A: D6.A R35.1 | length 3.4
  Top Layer w0.3: D6.A@45.339,21.59 45.339,18.542 R35.1@45.593,18.288
NetD7_A: D7.A R40.1
NetD8_A: D8.A R41.1
NetD9_A: D9.A P2.2 | length 8.3
  Top Layer w0.6: P2.2@56.841,27.432 58.746,25.527 62.203,25.527 D9.A@63.727,27.051
NetD10_A: D10.A R44.1
NetD10_K: D10.K U10.12 | length 4.8
  Bottom Layer w0.3: v1(62.937,33.401) 64.131,34.595 U10.12@67.265,34.595
NetD11_A: D11.A P4.2 | length 8.3
  Top Layer w0.6: P4.2@100.711,27.178 102.616,25.273 106.073,25.273 D11.A@107.597,26.797
NetD12_A: D12.A R45.1
NetD12_K: D12.K U11.12 | length 4.8
  Bottom Layer w0.3: v1(106.807,33.147) 108.001,34.341 U11.12@111.135,34.341
NetD15_3: D15.3 R52.2 SW1.2 | length 7.3
  Bottom Layer w0.4: R52.2@22.479,132.08 22.606,132.207 D15.3@24.496,132.207 24.496,131.46 24.762,131.194 26.794,131.194 SW1.2@27.764,130.224 ; SW1.2@27.765,129.793 SW1.2@27.764,130.224 ; SW1.2@27.764,130.493 SW1.2@27.764,130.224
NetD16_3: D16.3 R57.2 SW2.2 | length 8.7
  Bottom Layer w0.4: R57.2@36.068,144.78 36.195,144.907 D16.3@38.085,144.907 38.085,144.16 38.351,143.894 40.383,143.894 40.753,143.524 40.753,142.245 SW2.2@40.929,142.07 ; SW2.2@41.354,142.493 41.353,143.193 SW2.2@41.354,142.493
NetD17_3: D17.3 R62.2 SW3.2 | length 7.3
  Bottom Layer w0.4: R62.2@36.045,132.073 36.172,132.2 D17.3@38.062,132.2 38.062,131.453 38.328,131.187 40.36,131.187 SW3.2@41.33,130.217 ; SW3.2@41.331,129.787 SW3.2@41.33,130.217 ; SW3.2@41.33,130.486 SW3.2@41.33,130.217
NetD18_3: D18.3 R67.2 SW4.2 | length 7.3
  Bottom Layer w0.4: SW4.2@128.7,151.447 SW4.2@128.7,151.716 ; SW4.2@128.699,152.147 SW4.2@128.7,151.716 ; R67.2@133.985,149.86 133.858,149.733 D18.3@131.968,149.733 131.968,150.48 131.702,150.746 129.67,150.746 SW4.2@128.7,151.716
NetD19_3: D19.3 R72.2 SW5.2 | length 7.3
  Bottom Layer w0.4: SW5.2@128.685,138.688 SW5.2@128.685,138.957 ; SW5.2@128.684,139.388 SW5.2@128.685,138.957 ; R72.2@133.97,137.101 133.843,136.974 D19.3@131.953,136.974 131.953,137.721 131.687,137.987 129.655,137.987 SW5.2@128.685,138.957
NetD20_3: D20.3 R77.2 SW6.2 | length 7.3
  Bottom Layer w0.4: SW6.2@142.312,138.754 SW6.2@142.312,139.023 ; SW6.2@142.311,139.453 SW6.2@142.312,139.023 ; R77.2@147.597,137.167 147.47,137.04 D20.3@145.58,137.04 145.58,137.787 145.314,138.053 143.282,138.053 SW6.2@142.312,139.023
NetD21_3: D21.3 R82.2 SW7.2 | length 7.3
  Bottom Layer w0.4: SW7.2@158.941,72.394 SW7.2@158.941,72.663 ; SW7.2@158.94,73.094 SW7.2@158.941,72.663 ; R82.2@164.226,70.807 164.099,70.68 D21.3@162.209,70.68 162.209,71.427 161.943,71.693 159.911,71.693 SW7.2@158.941,72.663
NetD22_3: D22.3 R87.2 SW8.2 | length 7.3
  Bottom Layer w0.4: SW8.2@154.25,59.252 SW8.2@154.25,59.521 ; SW8.2@154.249,59.951 SW8.2@154.25,59.521 ; R87.2@159.535,57.665 159.408,57.538 D22.3@157.518,57.538 157.518,58.285 157.252,58.551 155.22,58.551 SW8.2@154.25,59.521
NetD23_3: D23.3 R92.2 SW9.2 | length 7.3
  Bottom Layer w0.4: SW9.2@147.138,46.933 SW9.2@147.138,47.202 ; SW9.2@147.137,47.632 SW9.2@147.138,47.202 ; R92.2@152.423,45.346 152.296,45.219 D23.3@150.406,45.219 150.406,45.966 150.14,46.232 148.108,46.232 SW9.2@147.138,47.202
NetD24_3: D24.3 R97.2 SW10.2 | length 7.3
  Bottom Layer w0.4: R97.2@17.399,39.624 17.526,39.751 D24.3@19.416,39.751 19.416,39.004 19.682,38.738 21.714,38.738 SW10.2@22.684,37.768 ; SW10.2@22.685,37.337 SW10.2@22.684,37.768 ; SW10.2@22.684,38.037 SW10.2@22.684,37.768
NetD25_3: D25.3 R102.2 SW11.2 | length 7.3
  Bottom Layer w0.4: R102.2@10.335,52.531 10.462,52.658 D25.3@12.352,52.658 12.352,51.911 12.618,51.645 14.65,51.645 SW11.2@15.62,50.675 ; SW11.2@15.621,50.244 SW11.2@15.62,50.675 ; SW11.2@15.62,50.944 SW11.2@15.62,50.675
NetD26_3: D26.3 R107.2 SW12.2 | length 7.3
  Bottom Layer w0.4: R107.2@5.565,65.652 5.692,65.779 D26.3@7.582,65.779 7.582,65.032 7.848,64.766 9.88,64.766 SW12.2@10.85,63.796 ; SW12.2@10.851,63.366 SW12.2@10.85,63.796 ; SW12.2@10.85,64.065 SW12.2@10.85,63.796
NetD27_K: D27.K L3.1 U23.5 | length 11.1
  Bottom Layer w1: L3.1@41.093,113.157 41.093,113.792 41.855,113.03 D27.K@44.732,113.03 44.732,111.919 U23.5@48.574,108.077
NetD28_K: D28.K L4.1 U24.5
NetF1_1: F1.1 J1.9 | length 13.4
  Bottom Layer w0.61: F1.1@72.4,133.223 83.058,133.223 84.133,134.298 J1.9@85.344,134.298
NetF2_1: F2.1 J4.1 | length 6.9
  Bottom Layer w0.7: F2.1@63.699,26.797 63.699,25.146 65.087,23.758 J4.1@65.087,20.504
NetF3_1: F3.1 J5.1 | length 6.9
  Bottom Layer w0.7: F3.1@107.569,26.543 107.569,24.892 108.957,23.504 J5.1@108.957,20.25
NetJ4_2: J4.2@64.287,20.504 U10.16 | length 16.4
  Bottom Layer w0.3: U10.16@59.465,33.945 61.123,33.945 61.54,33.528 61.54,24.638 64.287,21.891 J4.2@64.287,20.504
NetJ4_3: J4.3 U10.15 | length 15.1
  Bottom Layer w0.3: U10.15@59.465,33.295 60.578,33.295 60.879,32.994 60.879,24.283 63.487,21.675 J4.3@63.487,20.504
NetJ5_2: J5.2@108.157,20.25 U11.16 | length 16.4
  Bottom Layer w0.3: U11.16@103.335,33.691 104.993,33.691 105.41,33.274 105.41,24.384 108.157,21.637 J5.2@108.157,20.25
NetJ5_3: J5.3 U11.15 | length 15.1
  Bottom Layer w0.3: U11.15@103.335,33.041 104.448,33.041 104.749,32.74 104.749,24.029 107.357,21.421 J5.3@107.357,20.25
NetR2_1: R2.1 R3.2 U2.8 | length 7
  Top Layer w0.4: U2.8@70.418,134.874 R2.1@72.771,134.874 73.914,136.017 75.311,136.017 R3.2@76.454,134.874
NetR4_2: R4.2 R5.2 U2.5 | length 6.9
  Top Layer w0.3: U2.5@70.418,131.064 R5.2@72.771,131.064 73.787,130.048 75.438,130.048 R4.2@76.454,131.064
NetR8_1: R8.1 R10.2 U3.8 | length 7.6
  Top Layer w0.3: R10.2@94.234,131.064 95.377,129.921 96.774,129.921 R8.1@97.917,131.064 97.941,131.088 U3.8@100.905,131.088
NetR11_2: R11.2 R12.2 U3.5 | length 7.5
  Top Layer w0.3: R11.2@94.234,134.874 95.25,135.89 96.949,135.89 97.941,134.898 U3.5@100.905,134.898
NetR19_1: R19.1 U10.2
NetR21_1: R21.1 U10.3
NetR26_1: R26.1 U11.2
NetR28_1: R28.1 U11.3
NetR46_1: R46.1 U12.17 | length 4.6
  Bottom Layer w0.3: U12.17@90.709,152.249 90.884,152.074 90.884,151.265 91.25,150.899 93.368,150.899 93.853,151.384 R46.1@94.107,151.384
NetR47_1: R47.1 U15.14 | length 170.3
  Top Layer w0.3: v1(50.292,128.778) 50.292,133.223 49.657,133.858 49.657,136.017 50.419,136.779 52.324,136.779 ; 52.07,136.525 52.324,136.779 ; U15.14@52.832,139.332 52.832,137.287 52.324,136.779
  Bottom Layer w0.3: v1(50.292,128.778) 50.292,125.73 51.824,124.198 57.328,124.198 59.86,121.666 70.144,121.666 73.126,124.649 97.852,124.649 101.843,120.658 106.02,120.658 107.751,118.927 124.333,102.345 124.333,69.215 120.269,65.151 120.269,51.435 121.031,50.673 126.492,50.673 127.635,49.53 132.588,49.53 133.477,48.641 R47.1@133.477,48.133
NetR47_2: R47.2 U14.6 | length 2.4
  Bottom Layer w0.3: U14.6@133.406,44.397 133.406,46.665 R47.2@133.477,46.736